# EAGLE board hm11 (EAGLE 7.7.0)
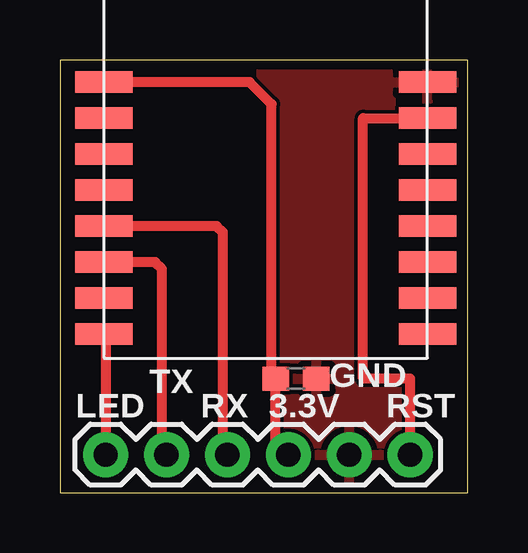
[diagram p0: board, top side]
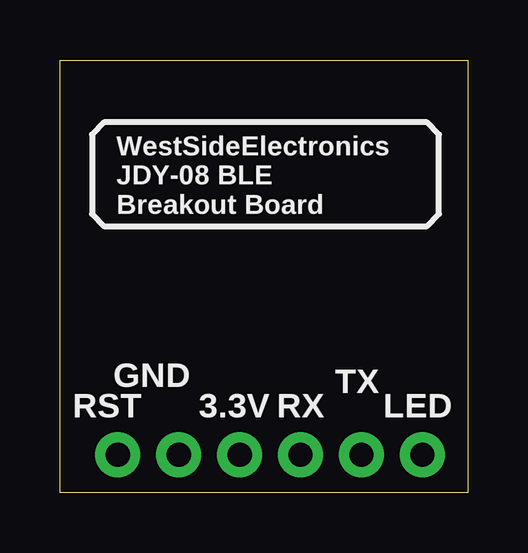
[diagram p1: board, bottom side, seen from below]

Size 17.02 x 18.03 mm. Coordinates in mm from the lower left corner, seen from the top.
Outline: 0,0 17.02,0 17.02,18.03 0,18.03 0,0
Copper layers (1*16): Top 0.0356mm / dielectric 1.5011mm / Bottom 0.0356mm
Design rules "LaenPCBOrder *": minimum track width 6mil, minimum drill 13mil, track to track 6mil, track to pad 6mil, pad to pad 6mil, via to via 6mil, smd to smd 6mil, copper to edge 15mil, drill to drill 6mil, minimum pad ring 7mil, minimum via ring 7mil, stop-mask expansion 3mil, vias tented up to drill 30mil, thermal gap 10mil

## Footprints (pad centres in the part's own frame; a part is rotated, then mirrored left to right if it is on the bottom)
0603 = smd 1.1 x 1: 1 -0.85,0; 2 0.85,0
1X06 = drill 1.016 pad 1.88: 1 0,0; 2 2.54,0; 3 5.08,0; 4 7.62,0; 5 10.16,0; 6 12.7,0
JDC08 = smd 2.4 x 0.9: DEBUG_CLK -7,1.96; DEBUG_DAT -7,0.46; GND 6.5,3.46; LED -7,-7.04; NC -7,-1.04; P02 6.5,-2.54; P03 6.5,-4.04; P04 6.5,-5.54; P05 6.5,-7.04; PO0 6.5,0.46; PO1 6.5,-1.04; PWM -7,-5.54; RESET 6.5,1.96; RX -7,-2.54; TX -7,-4.04; VCC -7,3.46

## Placement (x,y rotation side)
C1  1.0uF  [0603]  9.84,4.76 180 top
JP1  [1X06]  14.6,1.59 180 top
U$2  JDR08  [JDC08]  8.83,13.65 0 top

## Library data of the parts
C1 = SparkFun-Capacitors; PROD_ID: CAP-00868
JP1 = SparkFun-Connectors
U$2 = hm-11

## Nets
GND: C1.1 JP1.2 U$2.GND
N$2: JP1.1 U$2.RESET
N$3: JP1.5 U$2.TX
N$5: JP1.4 U$2.RX
N$7: JP1.6 U$2.LED
N$8: C1.2 JP1.3 U$2.VCC

## Tracks (layer width: path | path; a pad name or v marks a point on that pad's centre or on a via)
GND
  pour Top: 0.04,24.39 17.14,24.39 17.14,0.09 0.04,0.09
N$2
  Top 0.406: JP1.1 14.6,4.76 12.64,4.76 12.64,15.61 U$2.RESET
N$3
  Top 0.406: JP1.5 4.25,1.78 4.25,9.33 3.98,9.61 U$2.TX
N$5
  Top 0.406: JP1.4 6.79,1.78 6.79,10.86 6.54,11.11 U$2.RX
N$7
  Top 0.406: U$2.LED 1.91,6.53 JP1.6
N$8
  Top 0.406: JP1.3 arc-90 8.99,2.12 C1.2 arc-90 8.83,4.93 8.83,16.19 7.91,17.11 U$2.VCC

## Text on the board
tPlace: TX | GND | LED | RX | 3.3V | RST
bPlace: WestSideElectronics / JDY-08 BLE / Breakout Board | TX | GND | LED | RX | 3.3V | RST